# EAGLE board demeler_pcb (EAGLE 6.1)
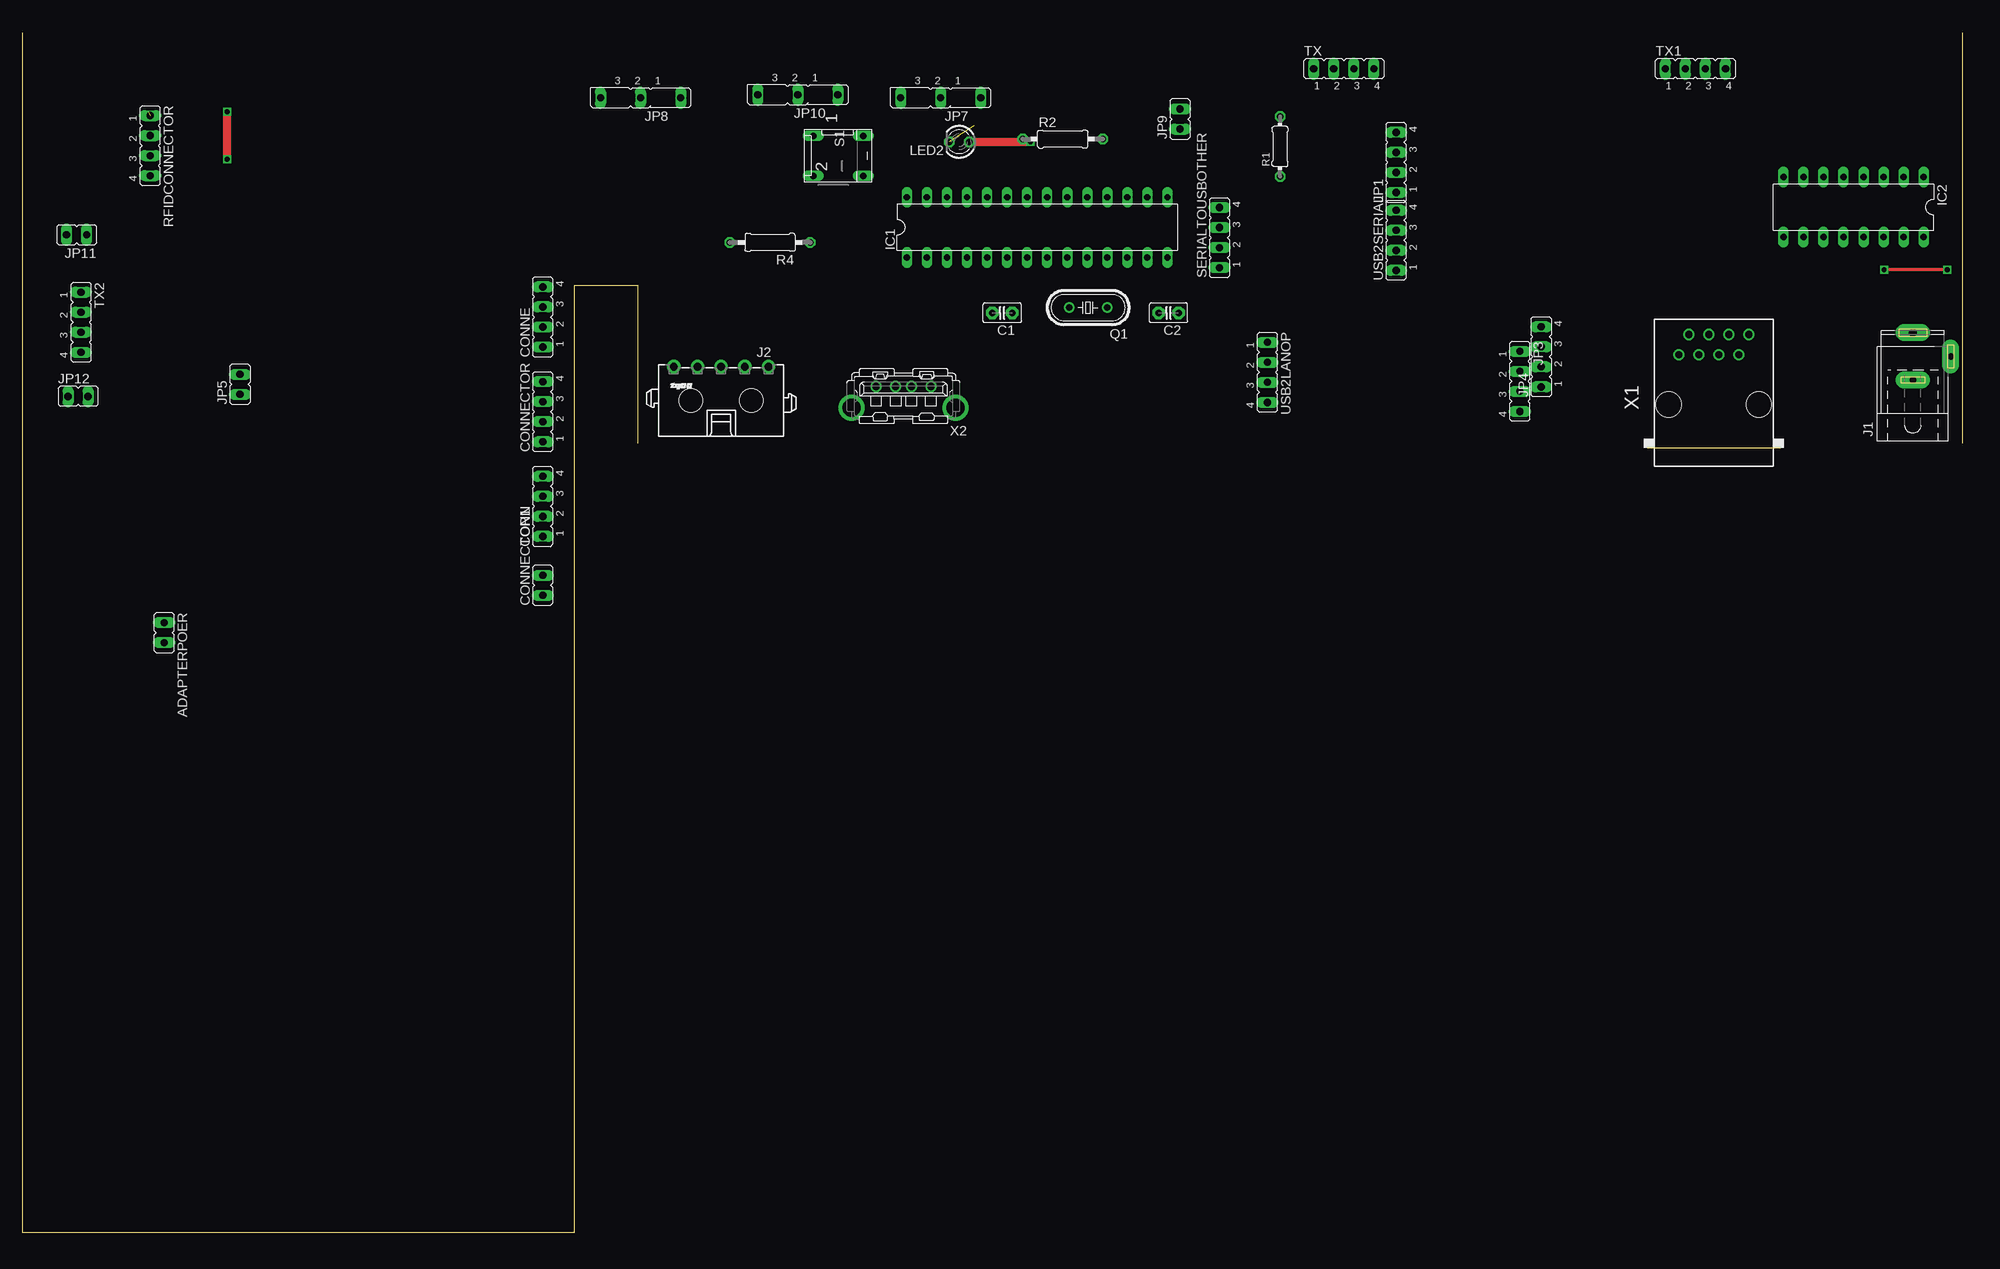
[diagram p0: board, top side]
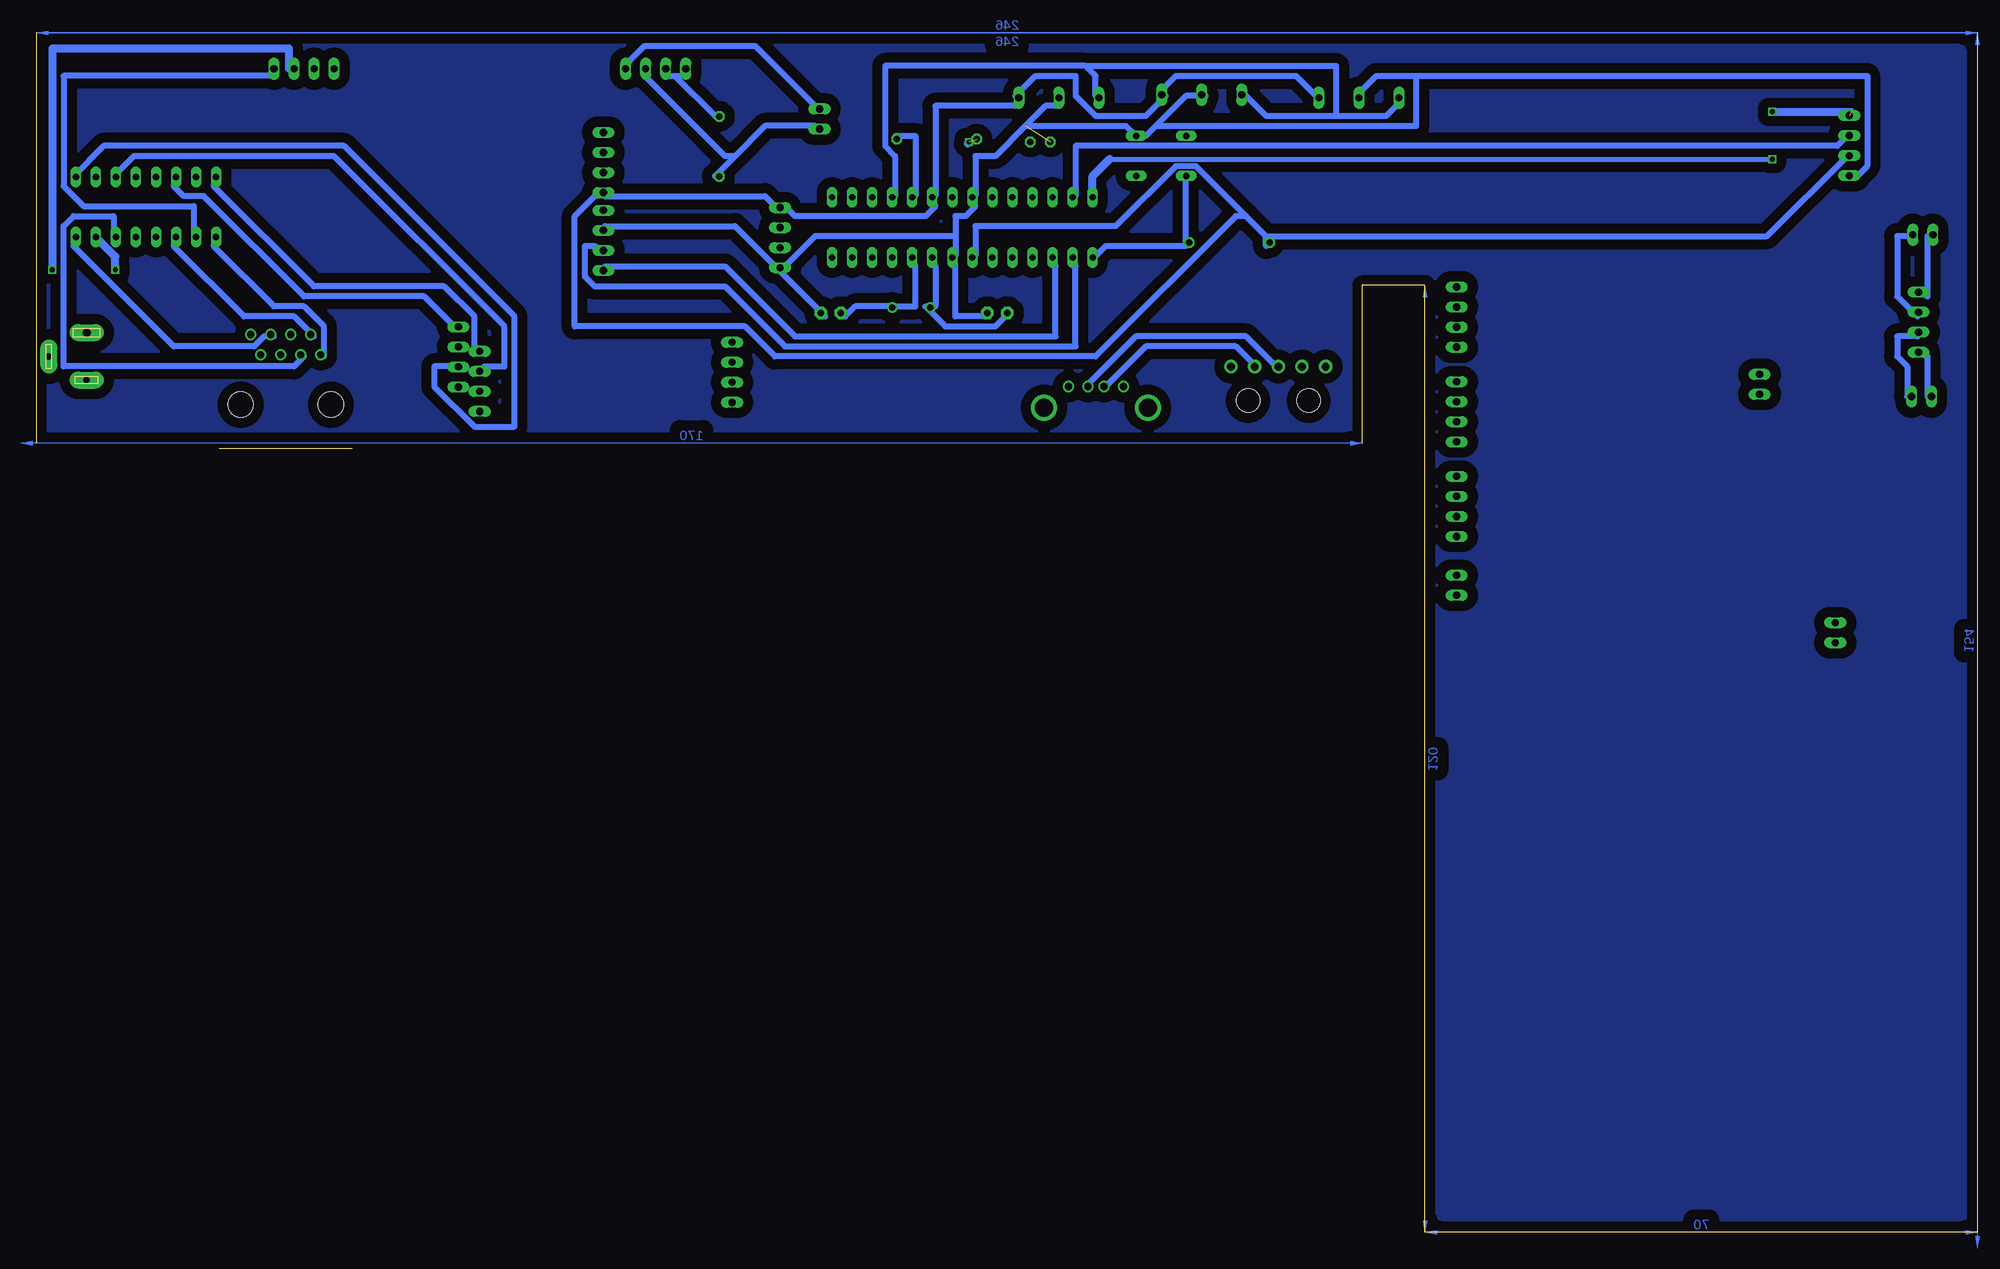
[diagram p1: board, bottom side, seen from below]

Size 246 x 152 mm. Coordinates in mm from the lower left corner, seen from the top.
Outline: 78,100 78,120 70,120 70,0 0,0 0,152
Outline: 246,100 246,152
Copper layers (1*16): Top 0.035mm / dielectric 1.5mm / Bottom 0.035mm
Design rules: minimum track width 30mil, minimum drill 24mil, track to track 8mil, track to pad 8mil, pad to pad 8mil, via to via 8mil, smd to smd 8mil, copper to edge 40mil, drill to drill 8mil, minimum pad ring 10mil, minimum via ring 8mil, stop-mask expansion 4mil, vias tented up to drill 0mil, thermal gap 10mil

## Footprints (pad centres in the part's own frame; a part is rotated, then mirrored left to right if it is on the bottom)
JP1 = drill 0.914 long: 1 0,-1.27; 2 0,1.27
C2.5-2 = drill 0.813 pad 1.6 octagon: 1 -1.27,0; 2 1.27,0
JP4 = drill 0.914 long: 1 -3.81,0; 2 -1.27,0; 3 1.27,0; 4 3.81,0
DIL28-3 = drill 0.813 long: 1 -16.51,-3.81; 2 -13.97,-3.81; 3 -11.43,-3.81; 4 -8.89,-3.81; 5 -6.35,-3.81; 6 -3.81,-3.81; 7 -1.27,-3.81; 8 1.27,-3.81; 9 3.81,-3.81; 10 6.35,-3.81; 11 8.89,-3.81; 12 11.43,-3.81; 13 13.97,-3.81; 14 16.51,-3.81; 15 16.51,3.81; 16 13.97,3.81; 17 11.43,3.81; 18 8.89,3.81; 19 6.35,3.81; 20 3.81,3.81; 21 1.27,3.81; 22 -1.27,3.81; 23 -3.81,3.81; 24 -6.35,3.81; 25 -8.89,3.81; 26 -11.43,3.81; 27 -13.97,3.81; 28 -16.51,3.81
DIL16 = drill 0.813 long: 1 -8.89,-3.81; 2 -6.35,-3.81; 3 -3.81,-3.81; 4 -1.27,-3.81; 5 1.27,-3.81; 6 3.81,-3.81; 7 6.35,-3.81; 8 8.89,-3.81; 9 8.89,3.81; 10 6.35,3.81; 11 3.81,3.81; 12 1.27,3.81; 13 -1.27,3.81; 14 -3.81,3.81; 15 -6.35,3.81; 16 -8.89,3.81
SPC4077 = drill 0.8 pad 2.184 long: 1 -3,0; 2 0,-4.8 | drill 1 pad 2.184 long: 3 3,0
1445055-5 = drill 1 pad 1.676: 1 6,4.32; 2 3,4.32; 3 0,4.32; 4 -3,4.32; 5 -6,4.32 | hole 3: -3.85,0; 3.85,0
JP2 = drill 0.914 long: 1 -5.08,0; 2 0,0; 3 5.08,0
LED3MM = drill 0.813 octagon: A -1.27,0; K 1.27,0
HC49/S = drill 0.813: 1 -2.413,0; 2 2.413,0
0204/7 = drill 0.813 octagon: 1 -3.81,0; 2 3.81,0
0207/10 = drill 0.813 octagon: 1 -5.08,0; 2 5.08,0
DP-02 = drill 0.813 long: 1 -2.54,-2.54; 2 2.54,-2.54; 3 2.54,3.81; 4 -2.54,3.81
RJ45-NO-SHIELD = drill 0.9 pad 1.4: 1 -4.445,6.35; 2 -3.175,8.89; 3 -1.905,6.35; 4 -0.635,8.89; 5 0.635,6.35; 6 1.905,8.89; 7 3.175,6.35; 8 4.445,8.89 | hole 3.251: -5.715,0; 5.715,0
KUSBVX = drill 0.9 pad 1.3: 1 3.5,0; 2 1,0; 3 -1,0; 4 -3.5,0 | drill 2.3 pad 2.8: M1 -6.57,2.71; M2 6.57,2.71

## Placement (x,y rotation side)
ADAPTERPOER  [JP1]  18,76 180 top
C1  22pf  [C2.5-2]  124.23,116.53 180 top
C2  22pf  [C2.5-2]  145.31,116.53 180 top
CONN  [JP4]  66,92 90 top
CONNE  [JP4]  66,116 90 top
CONNECTOR  [JP4]  66,104 90 top
CONNECTOR1  [JP1]  66,82 0 top
IC1  ATMEGA328  [DIL28-3]  128.66,127.37 0 top
IC2  L293D  [DIL16]  232.13,129.93 180 top
J1  [SPC4077]  239.65,111.01 90 top
J2  1445055-5  [1445055-5]  88.6,105.4 0 top
JP1  [JP4]  174.15,135.58 90 top
JP3  [JP4]  189.85,107.85 270 top
JP4  [JP4]  192.53,110.95 90 top
JP5  [JP1]  27.61,107.47 0 top
JP7  [JP2]  116.42,143.77 180 top
JP8  [JP2]  78.39,143.77 180 top
JP9  [JP1]  146.76,141.09 0 top
JP10  [JP2]  98.32,144.15 180 top
JP11  [JP1]  6.91,126.41 90 top
JP12  [JP1]  7.09,105.94 270 top
LED2  [LED3MM]  118.77,138.18 180 top
Q1  16MHZ  [HC49/S]  135.12,117.2 180 top
R1  [0204/7]  159.45,137.61 90 top
R2  330R  [0207/10]  131.9,138.55 0 top
R4  10K  [0207/10]  94.8,125.45 180 top
RFIDCONNECTOR  [JP4]  16.23,137.72 270 top
S1  [DP-02]  102.8,136.42 270 top
SERIALTOUSBOTHER  [JP4]  151.77,126.06 90 top
TX  [JP4]  167.52,147.47 0 top
TX1  [JP4]  212.09,147.47 0 top
TX2  [JP4]  7.47,115.34 270 top
USB2LANOP  [JP4]  157.85,108.99 270 top
USB2SERIAL  [JP4]  174.15,125.71 90 top
X1  RJ45-6X  [RJ45-NO-SHIELD]  214.41,104.89 0 top
X2  KUSBVX  [KUSBVX]  111.72,107.2 180 top

## Library data of the parts
ADAPTERPOER CONN CONNE CONNECTOR CONNECTOR1 JP1 JP3-JP5 JP7-JP12 RFIDCONNECTOR SERIALTOUSBOTHER TX TX1 TX2 USB2LANOP USB2SERIAL = jumper
C1 C2 = capacitor-wima
IC1 = quantum-research-group; OC_FARNELL: unknown; OC_NEWARK: unknown
IC2 = st-microelectronics; MPN: L293D; OC_FARNELL: 9589619; OC_NEWARK: 56P8249
J1 = con-jack; OC_FARNELL: unknown; OC_NEWARK: unknown
J2 = con-amp
LED2 = led
Q1 = crystal; OC_FARNELL: 1667008; OC_NEWARK: unknown
R1 R2 R4 = rcl
S1 = switch-dil; MPN: MCDP02; OC_FARNELL: 1255233; OC_NEWARK: 26M1095
X1 = con-tycoelectronics; MPN: RJ45-6X; OC_FARNELL: unknown; OC_NEWARK: 01P1604
X2 = con-kycon

## Nets
+5V: IC1.7 IC1.20 JP1.1 JP7.1 JP8.1 JP10.1 R4.2 RFIDCONNECTOR.3 SERIALTOUSBOTHER.4
GND: C1.1 C2.1 IC1.8 IC1.22 JP7.2 JP8.2 JP10.2 LED2.K RFIDCONNECTOR.4 S1.4 SERIALTOUSBOTHER.1 USB2SERIAL.3
GND1: IC2.4
GND2: IC2.5
GND3: IC2.13
GND4: IC2.12
N$1: C1.2 IC1.9 Q1.2
N$2: C2.2 IC1.10 Q1.1
N$3: IC1.3 USB2SERIAL.1
N$4: J2.3 X2.3
N$5: IC1.19 R2.2
N$6: IC2.9 X1.1
N$7: IC2.11 X1.2
N$8: IC2.14 X1.3
N$9: IC2.16 X1.6
N$10: IC2.8 JP3.1
N$11: IC2.6 JP4.4
N$12: IC2.3 JP3.2
N$13: IC2.1 JP4.2
N$14: IC2.10 TX1.4
N$15: IC2.15 TX1.3
N$16: IC1.2 USB2SERIAL.2
N$17: R1.2 TX.1 TX.2
N$18: JP9.1 R1.1 TX.3
N$19: J2.5
N$20: J2.2 X2.2
N$21: JP9.2 TX.4
N$23: JP5.2
N$24: IC1.27 RFIDCONNECTOR.2
N$25: IC1.28 RFIDCONNECTOR.1
N$26: IC1.18 JP7.3 JP8.3 JP10.3
N$27: JP11.2 TX2.1
N$28: JP11.1 TX2.2
N$29: JP12.2 TX2.3
N$30: JP12.1 TX2.4
N$31: IC1.1 R4.1 S1.2
N$32: LED2.A R2.1

## Tracks (layer width: path | path; a pad name or v marks a point on that pad's centre or on a via)
+5V
  Bottom 0.762: JP8.1 83.82,144.02 86.36,146.56 101.6,146.56 102.87,145.29 JP10.1 102.87,144.02 105.41,141.48 111.76,141.48 114.3,144.02 114.3,146.56 119.38,146.56 121.92,144.02 JP7.1 121.92,142.75 132.08,142.75 132.08,131.32 IC1.20 132.08,130.05 133.35,128.78 149.86,128.78 151.13,130.05 SERIALTOUSBOTHER.4 152.4,130.05 153.67,131.32 173.99,131.32 JP1.1 175.26,131.32 177.8,128.78 177.8,114.81 156.21,114.81 152.4,111 111.76,111 93.98,128.78 92.71,128.78 | 90.17,126.24 92.71,128.78 | 92.71,128.78 99.06,135.13 101.6,135.13 109.22,127.51 127,127.51 127,123.7 IC1.7 | 90.17,126.24 90.17,124.97 R4.2 | 90.17,126.24 26.67,126.24 16.51,136.4 RFIDCONNECTOR.3
GND  (1 unrouted)
  Bottom 0.762: 71.12,146.56 76.2,146.56 78.74,144.02 JP8.2 | 71.12,146.56 13.97,146.56 13.97,135.13 15.24,133.86 RFIDCONNECTOR.4 | 152.4,122.43 157.48,127.51 173.99,127.51 USB2SERIAL.3 | 152.4,122.43 146.05,116.08 C2.1 | 152.4,122.43 SERIALTOUSBOTHER.1 151.13,122.43 147.32,126.24 129.54,126.24 | 104.14,140.21 100.33,144.02 97.79,144.02 JP10.2 | 104.14,140.21 105.41,138.94 S1.4 106.68,138.94 107.95,140.21 120.65,140.21 | C1.1 125.73,116.08 129.54,116.08 129.54,122.43 IC1.8 129.54,123.7 129.54,126.24 | 120.65,140.21 118.11,142.75 116.84,142.75 JP7.2 | 120.65,140.21 124.46,136.4 127,136.4 127,131.32 IC1.22 127,130.05 128.27,128.78 129.54,128.78 129.54,126.24 | 71.12,146.56 71.12,140.21 104.14,140.21
N$1
  Bottom 0.762: IC1.9 132.08,122.43 132.08,117.35 Q1.2 133.35,117.35 130.81,114.81 124.46,114.81 123.19,116.08 C1.2
N$2
  Bottom 0.762: 137.16,117.35 134.62,117.35 134.62,122.43 IC1.10 | 137.16,117.35 142.24,117.35 143.51,116.08 C2.2 | 137.16,117.35 Q1.1
N$3
  Bottom 0.762: IC1.3 116.84,122.43 116.84,113.54 149.86,113.54 158.75,122.43 173.99,122.43 USB2SERIAL.1
N$4
  Bottom 0.762: X2.3 113.03,107.19 106.68,113.54 92.71,113.54 88.9,109.73 J2.3
N$5
  Bottom 0.762: IC1.19 134.62,131.32 134.62,138.94 137.16,138.94 R2.2
N$6
  Bottom 0.762: IC2.9 223.52,124.97 215.9,117.35 212.09,117.35 209.55,114.81 209.55,111 X1.1
N$7
  Bottom 0.762: IC2.11 228.6,124.97 219.71,116.08 213.36,116.08 210.82,113.54 X1.2
N$8
  Bottom 0.762: IC2.14 236.22,126.24 236.22,128.78 241.3,128.78 242.57,127.51 242.57,109.73 213.36,109.73 212.09,111 X1.3
N$9
  Bottom 0.762: IC2.16 241.3,124.97 228.6,112.27 218.44,112.27 217.17,113.54 215.9,113.54 X1.6
N$10
  Bottom 0.762: IC2.8 223.52,132.59 210.82,119.89 194.31,119.89 190.5,116.08 190.5,112.27 JP3.1
N$11
  Bottom 0.762: IC2.6 228.6,132.59 227.33,131.32 224.79,131.32 212.09,118.62 196.85,118.62 193.04,114.81 JP4.4
N$12
  Bottom 0.762: IC2.3 236.22,133.86 233.68,136.4 208.28,136.4 186.69,114.81 186.69,109.73 189.23,109.73 JP3.2
N$13
  Bottom 0.762: IC2.1 241.3,133.86 237.49,137.67 207.01,137.67 185.42,116.08 185.42,102.11 190.5,102.11 195.58,107.19 195.58,109.73 193.04,109.73 JP4.2
N$14
  Bottom 0.762: IC2.10 226.06,126.24 226.06,130.05 240.03,130.05 242.57,132.59 242.57,146.56 215.9,146.56 TX1.4
N$15  (via drill 0.6)
  Top 0.406: v244,122 v236,122
  Bottom 0.406: TX1.3 214,147.47
  Bottom 1.016: 214,147.47 214,150 244,150 v244,122 | v236,122 236,123.64 IC2.15
N$16
  Bottom 0.762: IC1.2 114.3,122.43 114.3,112.27 151.13,112.27 158.75,119.89 175.26,119.89 176.53,121.16 176.53,124.97 175.26,124.97 USB2SERIAL.2
N$17
  Bottom 0.762: 165.1,146.56 160.02,141.48 R1.2 | 165.1,146.56 166.37,146.56 TX.2 | 165.1,146.56 163.83,146.56 TX.1
N$18
  Bottom 0.762: 157.48,136.4 153.67,140.21 147.32,140.21 JP9.1 | 157.48,136.4 160.02,133.86 R1.1 | 157.48,136.4 158.75,136.4 168.91,146.56 TX.3
N$20
  Bottom 0.762: X2.2 110.49,107.19 105.41,112.27 93.98,112.27 91.44,109.73 J2.2
N$21
  Bottom 0.762: JP9.2 147.32,142.75 154.94,150.37 168.91,150.37 171.45,147.83 TX.4
N$22
  pour Bottom (isolate 1.27): 6,0 0,0 0,152 246,152 246,148 246,100 78,100 78,120 70,120 70,118 70,0
N$24
  Bottom 0.762: IC1.27 114.3,131.32 114.3,137.67 17.78,137.67 16.51,138.94 RFIDCONNECTOR.2
N$25  (via drill 0.6)  (1 unrouted)
  Top 1.016: v26,136 v26,142
  Bottom 0.61: 110,136 v26,136
  Bottom 1.016: IC1.28 112.15,133.85 110,136 | v26,142 16,142
N$26
  Bottom 0.762: 81.28,141.48 90.17,141.48 92.71,144.02 JP10.3 | 81.28,141.48 74.93,141.48 73.66,142.75 JP8.3 | 113.03,147.83 138.43,147.83 138.43,137.67 137.16,136.4 137.16,131.32 IC1.18 | 113.03,147.83 111.76,146.56 111.76,144.02 JP7.3 | 81.28,141.48 81.28,147.83 113.03,147.83
N$27
  Bottom 0.762: TX2.1 6.35,118.62 6.35,126.24 JP11.2
N$28
  Bottom 0.762: TX2.2 7.62,116.08 10.16,118.62 10.16,126.24 8.89,126.24 JP11.1
N$29
  Bottom 0.762: JP12.2 8.89,105.92 8.89,109.73 10.16,111 10.16,113.54 7.62,113.54 TX2.3
N$30
  Bottom 0.762: JP12.1 6.35,105.92 6.35,111 TX2.4
N$31
  Bottom 0.762: 100.33,124.97 110.49,124.97 111.76,123.7 IC1.1 | 100.33,124.97 100.33,133.86 S1.2 | 100.33,124.97 R4.1
N$32  (via drill 0.6)  (1 unrouted)
  Top 1.016: LED2.A v127.82,138.18
  Bottom 1.016: v127.82,138.18 128,138
(copper drawn outside any net)
  shapes: Bottom area x7